# EAGLE board Noise Percussion PANEL (EAGLE 7.7.0)
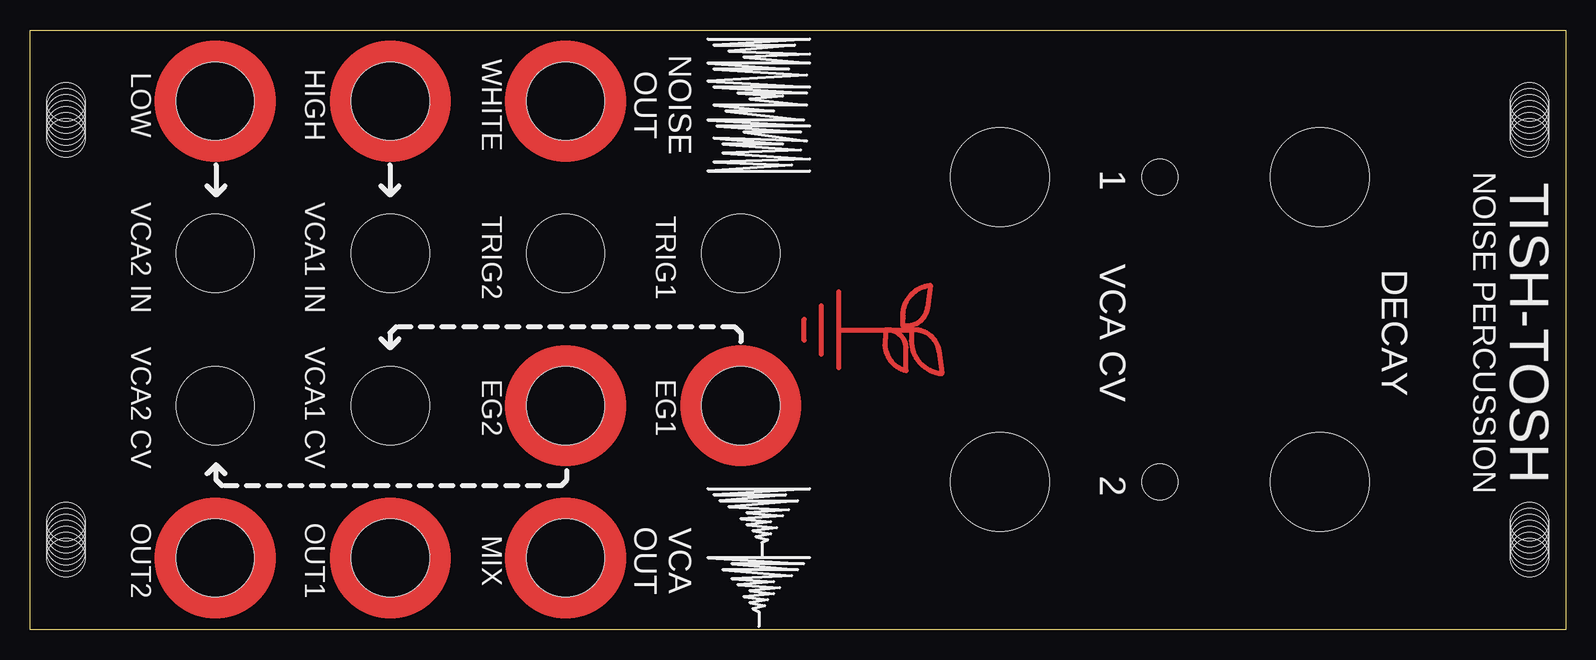
[diagram p0: board, top side]
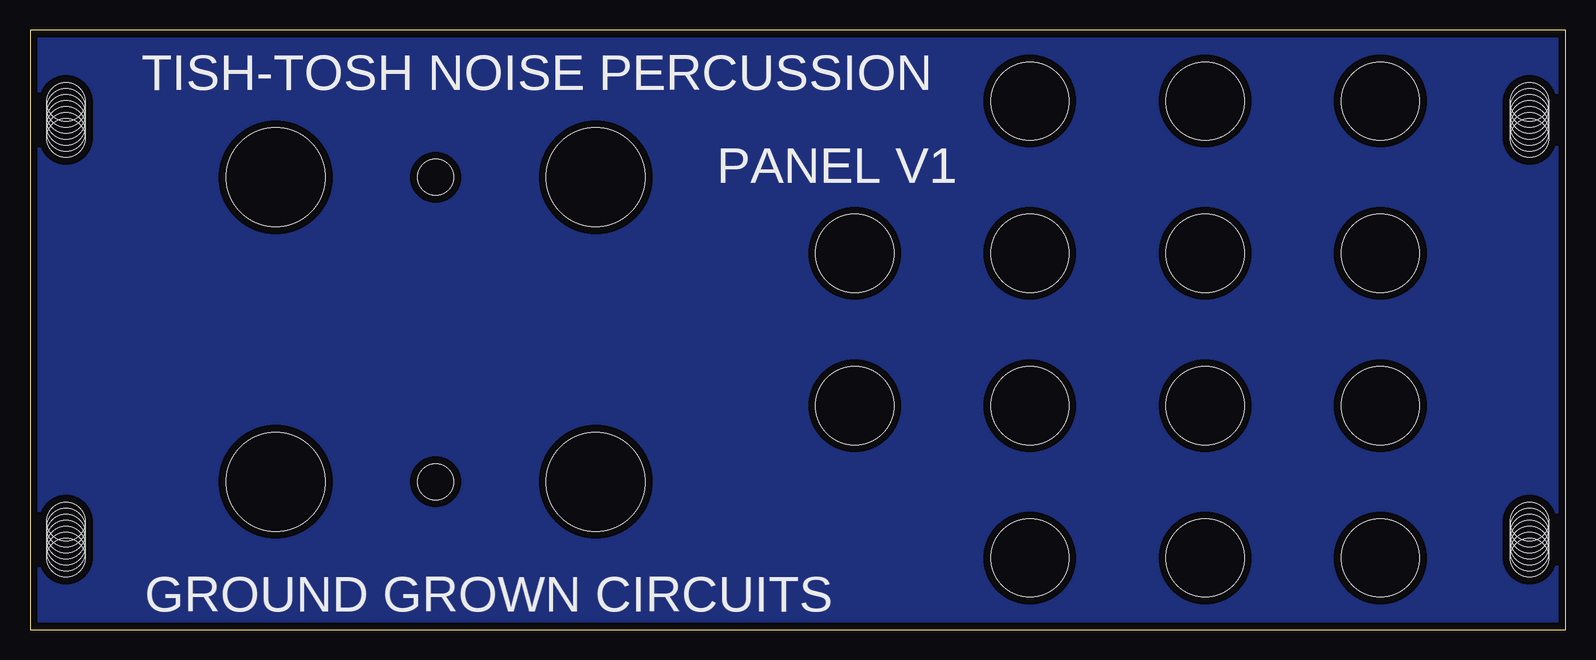
[diagram p1: board, bottom side, seen from below]

Size 128 x 50 mm. Coordinates in mm from the lower left corner, seen from the top.
Outline: 0,0 0,50 128,50 128,0 0,0
Copper layers (1*16): Top 0.035mm / dielectric 1.5mm / Bottom 0.035mm
Design rules "SparkFun": minimum track width 8mil, minimum drill 20mil, track to track 8mil, track to pad 8mil, pad to pad 8mil, via to via 8mil, smd to smd 8mil, copper to edge 8mil, drill to drill 8mil, minimum pad ring 12mil, minimum via ring 10mil, stop-mask expansion 4mil, vias tented up to drill 20mil, thermal gap 10mil

## Footprints (pad centres in the part's own frame; a part is rotated, then mirrored left to right if it is on the bottom)
JACK_DRILL = hole 6.5: 0,0
LED_3MM_DRILL = hole 3: 0,0
POT_DRILL = hole 8.25: 0,0
JACK_DRILL_COPPER_SM = hole 6.5: 0,0
MOUNT_DRILL = hole 3.2: 3,9; 3,8.5; 3,8; 3,7.5; 3,7; 3,6.5; 3,6

## Placement (x,y rotation side)
CV.1  [JACK_DRILL]  30.05,18.67 90 top
CV.2  [JACK_DRILL]  15.44,18.67 90 top
D2  [LED_3MM_DRILL]  94.18,37.72 90 top
D4  [LED_3MM_DRILL]  94.18,12.32 270 top
DECAY1  A500K  [POT_DRILL]  107.52,37.72 180 top
DECAY2  A500K  [POT_DRILL]  107.52,12.32 180 top
DK1  [JACK_DRILL_COPPER_SM]  59.26,18.67 90 top
DK2  [JACK_DRILL_COPPER_SM]  44.65,18.67 90 top
E$1  [MOUNT_DRILL]  0,0 0 top
E$2  [MOUNT_DRILL]  128,50 180 top
E$3  [MOUNT_DRILL]  0,50 180 bottom
E$4  [MOUNT_DRILL]  128,0 0 bottom
E$5  [LOGO_MED_COPPER]  67.5,25 270 top
HP_N  [JACK_DRILL_COPPER_SM]  30.05,44.07 90 top
IN1  [JACK_DRILL]  30.05,31.37 90 top
IN2  [JACK_DRILL]  15.44,31.37 90 top
LP_N  [JACK_DRILL_COPPER_SM]  15.44,44.07 90 top
LVL1  B100K  [POT_DRILL]  80.85,37.72 180 top
LVL2  B100K  [POT_DRILL]  80.85,12.32 180 top
MIX  [JACK_DRILL_COPPER_SM]  44.65,5.97 90 top
OUT1  [JACK_DRILL_COPPER_SM]  30.05,5.97 90 top
OUT2  [JACK_DRILL_COPPER_SM]  15.44,5.97 90 top
TR1  [JACK_DRILL]  59.26,31.37 90 top
TR2  [JACK_DRILL]  44.65,31.37 90 top
W_N  [JACK_DRILL_COPPER_SM]  44.65,44.07 90 top

## Library data of the parts
CV.1 CV.2 D2 D4 DK1 DK2 E$1-E$5 HP_N IN1 IN2 LP_N MIX OUT1 OUT2 TR1 TR2 W_N = GroundGrownCircuits
DECAY1 DECAY2 LVL1 LVL2 = GroundGrownCircuits; PROD_ID: RES-09177

## Tracks (layer width: path | path; a pad name or v marks a point on that pad's centre or on a via)
S$1
  pour Bottom (isolate 0.61): 0,0 0,50 128,50 128,0

## Text on the board
tPlace: LOW | HIGH | WHITE | NOISE / OUT | 1 | VCA2 IN | VCA1 IN | TRIG2 | TRIG1 | VCA CV | DECAY | NOISE PERCUSSION | TISH-TOSH | VCA2 CV | VCA1 CV | EG2 | EG1 | 2 | OUT2 | OUT1 | MIX | VCA / OUT
bPlace: TISH-TOSH NOISE PERCUSSION | PANEL V1 | GROUND GROWN CIRCUITS